# EAGLE board shift_4leds_button (EAGLE 5.06)
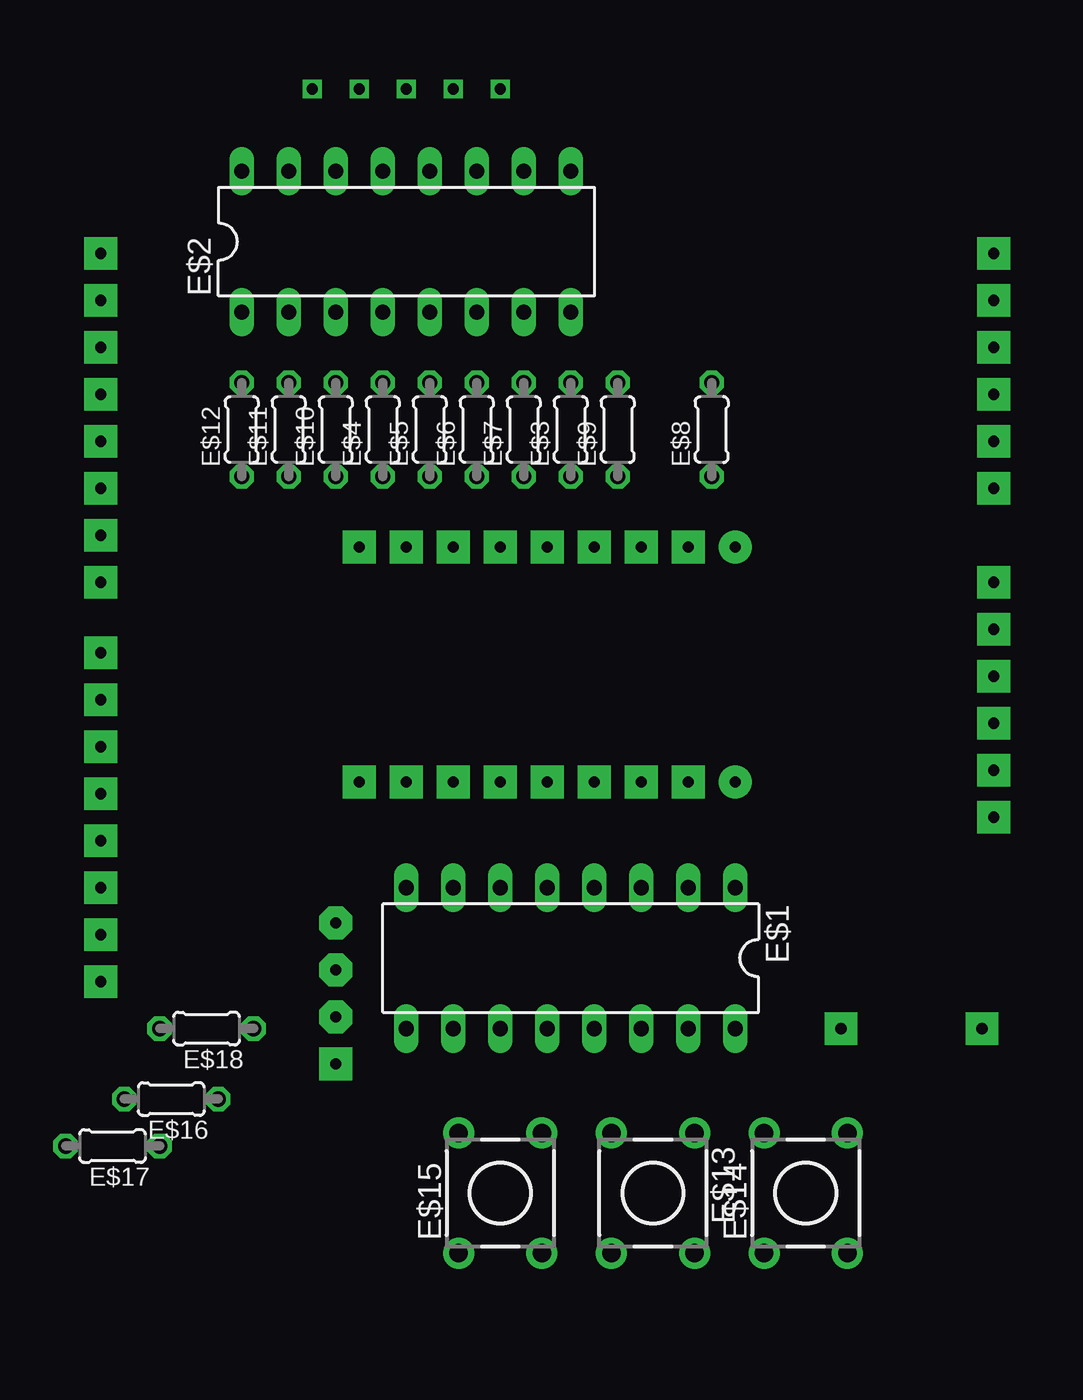
[diagram p0: board, top side]
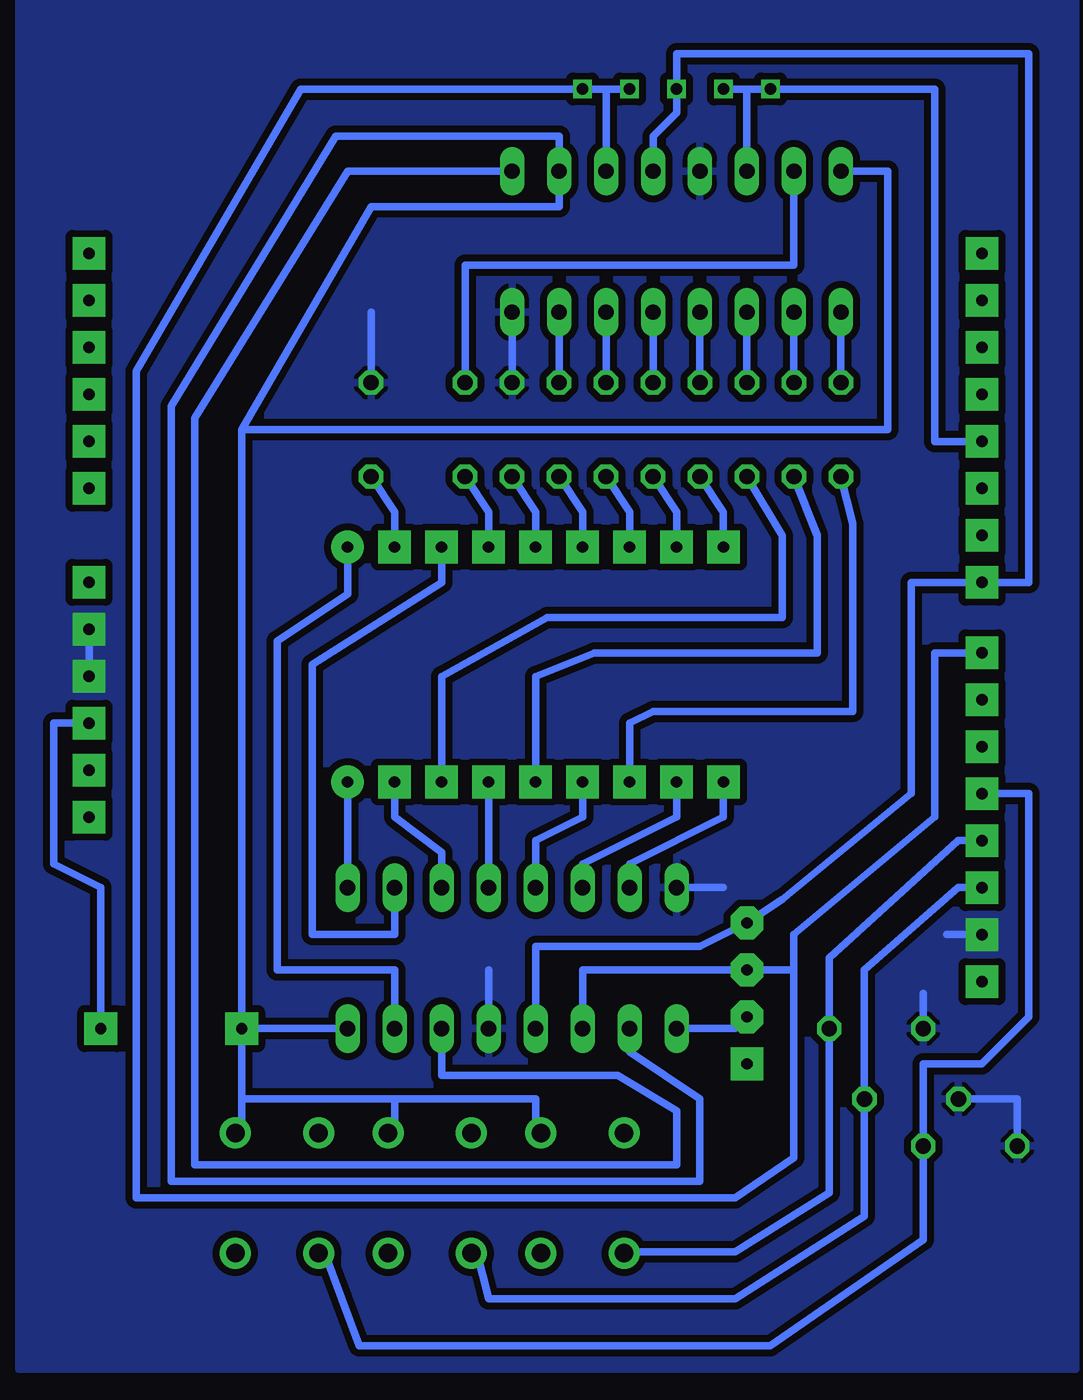
[diagram p1: board, bottom side, seen from below]

No outline drawn. Coordinates in mm, seen from the top.
Copper layers (1*16): Top 0.035mm / dielectric 1.5mm / Bottom 0.035mm
Design rules "default *": minimum track width 10mil, minimum drill 24mil, track to track 15mil, track to pad 15mil, pad to pad 8mil, via to via 8mil, smd to smd 8mil, copper to edge 40mil, drill to drill 8mil, minimum pad ring 10mil, minimum via ring 8mil, stop-mask expansion 4mil, vias tented up to drill 0mil, thermal gap 10mil

## Footprints (pad centres in the part's own frame; a part is rotated, then mirrored left to right if it is on the bottom)
DIL16 = drill 0.813 long: 1 -8.89,-3.81; 2 -6.35,-3.81; 3 -3.81,-3.81; 4 -1.27,-3.81; 5 1.27,-3.81; 6 3.81,-3.81; 7 6.35,-3.81; 8 8.89,-3.81; 9 8.89,3.81; 10 6.35,3.81; 11 3.81,3.81; 12 1.27,3.81; 13 -1.27,3.81; 14 -3.81,3.81; 15 -6.35,3.81; 16 -8.89,3.81
0204/5 = drill 0.813 octagon: 1 -2.54,0; 2 2.54,0
TL1105 = drill 1 pad 1.676 round: 1 -2.25,3.25; 2 2.25,3.25; 3 -2.25,-3.25; 4 2.25,-3.25

## Placement (x,y rotation side)
E$1  [DIL16]  30.48,21.59 180 top
E$2  [DIL16]  21.59,60.33 0 top
E$3  [0204/5]  30.48,50.16 90 top
E$4  [0204/5]  20.32,50.16 90 top
E$5  [0204/5]  22.86,50.16 90 top
E$6  [0204/5]  25.4,50.16 90 top
E$7  [0204/5]  27.94,50.16 90 top
E$8  [0204/5]  38.1,50.16 90 top
E$9  [0204/5]  33.02,50.16 90 top
E$10  [0204/5]  17.78,50.16 90 top
E$11  [0204/5]  15.24,50.16 90 top
E$12  [0204/5]  12.7,50.16 90 top
E$13  [TL1105]  34.92,8.89 180 top
E$14  [TL1105]  43.18,8.89 0 top
E$15  [TL1105]  26.67,8.89 0 top
E$16  [0204/5]  8.89,13.97 180 top
E$17  [0204/5]  5.71,11.43 180 top
E$18  [0204/5]  10.79,17.78 180 top

## Library data of the parts
E$1 E$2 = 40xx
E$3-E$12 E$16-E$18 = rcl
E$13-E$15 = switch

## Nets
+5V: E$1.10 E$1.16 E$2.16
GND: E$1.8 E$1.13 E$2.8 E$2.13 E$3.2 E$8.2 E$16.2 E$17.2 E$18.2
S$1: E$1.7
S$2: E$1.6
S$3: E$12.1
S$4: E$1.5
S$5: E$11.1
S$6: E$5.1
S$7: E$2.1 E$12.2
S$8: E$1.12 E$2.12
S$9: E$4.1
S$10: E$7.1
S$11: E$6.1
S$12: E$2.15 E$9.2
S$13: E$10.1
S$14: E$1.3
S$15: E$1.2
S$16: E$1.14 E$2.9
S$17: E$1.4
S$18: E$8.1
S$19: E$3.1
S$21: E$2.14
S$22: E$9.1
S$23: E$1.11 E$2.11
S$24: E$2.2 E$11.2
S$25: E$2.3 E$10.2
S$26: E$2.4 E$4.2
S$27: E$2.5 E$5.2
S$28: E$2.6 E$6.2
S$29: E$2.7 E$7.2
S$33: E$1.1
S$41: E$1.15
S$52: E$1.9

## Tracks (layer width: path | path; a pad name or v marks a point on that pad's centre or on a via)
+5V  (via drill 0.6 pad 1.78)
  Bottom 0.406: 45.09,50.16 38.1,62.23 27.94,62.23 27.94,66.04 40.01,66.04 48.9,51.44 48.9,9.53 20.32,9.53 20.32,13.97 24.13,16.51 E$1.10 | 45.09,50.16 v45.09,17.78 | v45.09,17.78 E$1.16 | E$2.16 10.16,64.14 10.16,50.16 45.09,50.16 | 29.21,12.06 29.21,13.97 36.83,13.97 | 36.83,13.97 36.83,12.06 | 45.09,13.97 36.83,13.97 | 45.09,13.97 45.09,12.06 | v45.09,17.78 45.09,13.97
GND  (via drill 0.6 pad 1.78)
  Bottom 0.406: 19.05,25.4 E$1.8 | E$2.13 20.32,64.77 | E$1.13 31.75,20.95 | E$3.2 E$2.8 | E$8.2 38.1,56.52 | v53.34,36.83 v53.34,39.37 | v5.08,22.86 6.99,22.86 | E$16.2 3.17,13.97 E$17.2 | E$18.2 8.26,19.68
  pour Bottom: 0,73.66 57.15,73.66 57.15,-0.64 0,-0.64
S$1  (via drill 0.6 pad 1.78)
  Bottom 0.406: v19.05,31.11 19.05,29.21 24.13,26.67 E$1.7
S$2  (via drill 0.6 pad 1.78)
  Bottom 0.406: v21.59,31.11 21.59,29.21 26.67,26.67 E$1.6
S$3  (via drill 0.6 pad 1.78)
  Bottom 0.406: v24.13,31.11 24.13,34.29 22.86,34.92 12.06,34.92 12.06,45.09 E$12.1
S$4  (via drill 0.6 pad 1.78)
  Bottom 0.406: E$1.5 29.21,27.94 26.67,29.21 v26.67,31.11
S$5  (via drill 0.6 pad 1.78)
  Bottom 0.406: v29.21,31.11 29.21,36.83 26.04,38.1 13.97,38.1 13.97,44.45 E$11.1
S$6  (via drill 0.6 pad 1.78)
  Bottom 0.406: v21.59,43.81 21.59,45.72 E$5.1
S$7
  Bottom 0.406: E$12.2 E$2.1
S$8  (via drill 0.6, 0.6 pad 1.78)
  Bottom 0.406: E$2.12 22.86,66.04 21.59,67.31 v21.59,68.58 21.59,70.48 2.54,70.48 2.54,41.91 v5.08,41.91 8.89,41.91 8.89,30.48 15.88,24.77 17.78,23.5 20.32,22.23 29.21,22.23 E$1.12
S$9  (via drill 0.6 pad 1.78)
  Bottom 0.406: v19.05,43.81 19.05,45.72 E$4.1
S$10  (via drill 0.6 pad 1.78)
  Bottom 0.406: v26.67,43.81 26.67,45.72 E$7.1
S$11  (via drill 0.6 pad 1.78)
  Bottom 0.406: v24.13,43.81 24.13,45.72 E$6.1
S$12
  Bottom 0.406: E$2.15 15.24,59.05 33.02,59.05 E$9.2
S$13  (via drill 0.6 pad 1.78)
  Bottom 0.406: v34.29,31.11 34.29,36.83 28.57,40.01 15.88,40.01 15.88,44.45 E$10.1
S$14  (via drill 0.6 pad 1.78)
  Bottom 0.406: v36.83,31.11 36.83,29.21 34.29,27.3 E$1.3
S$15  (via drill 0.6 pad 1.78)
  Bottom 0.406: v34.29,43.81 34.29,41.91 41.27,37.47 41.27,22.86 36.83,22.86 E$1.2
S$16
  Bottom 0.406: E$2.9 39.37,64.14 47.62,50.8 47.62,10.41 21.59,10.41 21.59,13.34 24.77,15.24 34.29,15.24 E$1.14
S$17  (via drill 0.6 pad 1.78)
  Bottom 0.406: E$1.4 v31.75,31.11
S$18  (via drill 0.6 pad 1.78)
  Bottom 0.406: v36.83,43.81 36.83,45.72 E$8.1
S$19  (via drill 0.6 pad 1.78)
  Bottom 0.406: v29.21,43.81 29.21,45.72 E$3.1
S$20  (via drill 0.6 pad 1.78)
  other vias: 5.08,59.69
S$21  (via drill 0.6, 0.6 pad 1.78)
  Bottom 0.406: v19.05,68.58 17.78,68.58 E$2.14 | v19.05,68.58 v16.51,68.58 | v19.05,68.58 7.62,68.58 7.62,49.53 v5.08,49.53
S$22  (via drill 0.6 pad 1.78)
  Bottom 0.406: v31.75,43.81 31.75,45.72 E$9.1
S$23  (via drill 0.6, 0.6 pad 1.78)
  Bottom 0.406: E$2.11 25.4,68.58 v26.67,68.58 | v26.67,68.58 v24.13,68.58 v26.67,68.58 | v26.67,68.58 41.91,68.58 50.8,53.34 50.8,8.64 18.41,8.64 15.24,10.79 15.24,20.95 | E$1.11 26.67,20.95 v17.78,20.95 15.24,20.95 | 15.24,20.95 15.24,22.86 7.62,29.21 7.62,38.1 v5.08,38.1
S$24
  Bottom 0.406: E$11.2 E$2.2
S$25
  Bottom 0.406: E$10.2 E$2.3
S$26
  Bottom 0.406: E$4.2 E$2.4
S$27
  Bottom 0.406: E$5.2 E$2.5
S$28
  Bottom 0.406: E$6.2 E$2.6
S$29
  Bottom 0.406: E$7.2 E$2.7
S$30  (via drill 0.6 pad 1.78)
  other vias: 5.08,57.15
S$31  (via drill 0.6 pad 1.78)
  other vias: 5.08,54.61
S$32  (via drill 0.6 pad 1.78)
  other vias: 5.08,52.07
S$33  (via drill 0.6 pad 1.78)
  Bottom 0.406: E$1.1 v39.37,31.11
S$34  (via drill 0.6 pad 1.78)
  other vias: 5.08,46.99
S$35  (via drill 0.6 pad 1.78)
  other vias: 5.08,44.45
S$36  (via drill 0.6 pad 1.78)
  other vias: 17.78,15.88
S$37  (via drill 0.6 pad 1.78)
  Bottom 0.406: 32.38,5.71 31.75,3.17 18.41,3.17 11.43,7.62 11.43,20.95 6.35,25.4 v5.08,25.4
S$38  (via drill 0.6 pad 1.78)
  other vias: 5.08,35.56
S$39  (via drill 0.6 pad 1.78)
  Bottom 0.406: v5.08,30.48 2.54,30.48 2.54,18.41 5.08,15.88 8.26,15.88 8.26,6.35 16.51,0.64 38.73,0.64 40.64,5.71
S$40  (via drill 0.6 pad 1.78)
  other vias: 5.08,33.02
S$41  (via drill 0.6 pad 1.78)
  Bottom 0.406: E$1.15 36.83,20.95 43.18,20.95 43.18,38.73 39.37,41.27 v39.37,43.81
S$43  (via drill 0.6 pad 1.78)
  other vias: 17.78,23.5
S$44  (via drill 0.6 pad 1.78)
  other vias: 5.08,20.32
S$45  (via drill 0.6 pad 1.78)
  other vias: 53.34,59.69
S$46  (via drill 0.6 pad 1.78)
  other vias: 53.34,57.15
S$47  (via drill 0.6 pad 1.78)
  other vias: 53.34,54.61
S$48  (via drill 0.6 pad 1.78)
  other vias: 53.34,52.07
S$49  (via drill 0.6 pad 1.78)
  other vias: 53.34,49.53
S$50  (via drill 0.6 pad 1.78)
  other vias: 53.34,46.99
S$51  (via drill 0.6 pad 1.78)
  other vias: 53.34,41.91
S$52  (via drill 0.6 pad 1.78)
  Bottom 0.406: E$1.9 18.41,17.78 v17.78,18.41
S$54  (via drill 0.6 pad 1.78)
  Bottom 0.406: v53.34,34.29 55.24,34.29 55.24,26.67 52.7,25.4 v52.7,17.78
S$55  (via drill 0.6 pad 1.78)
  other vias: 53.34,31.75
S$56  (via drill 0.6 pad 1.78)
  other vias: 53.34,29.21
S$57  (via drill 0.6 pad 1.78)
  Bottom 0.406: 24.77,5.71 18.41,5.71 13.34,8.89 13.34,21.59 6.35,27.94 v5.08,27.94